# EAGLE board BMS_header (EAGLE 7.6.0)
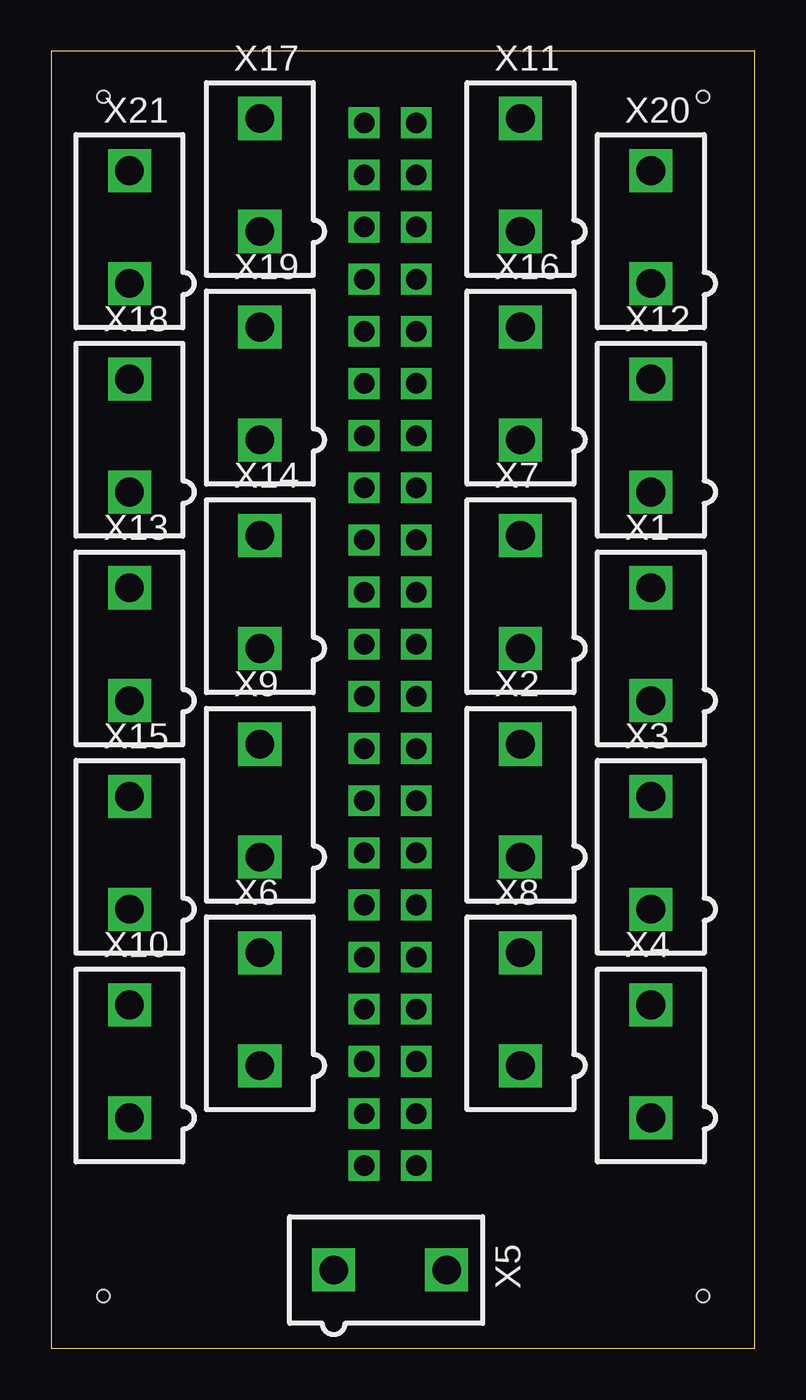
[diagram p0: board, top side]
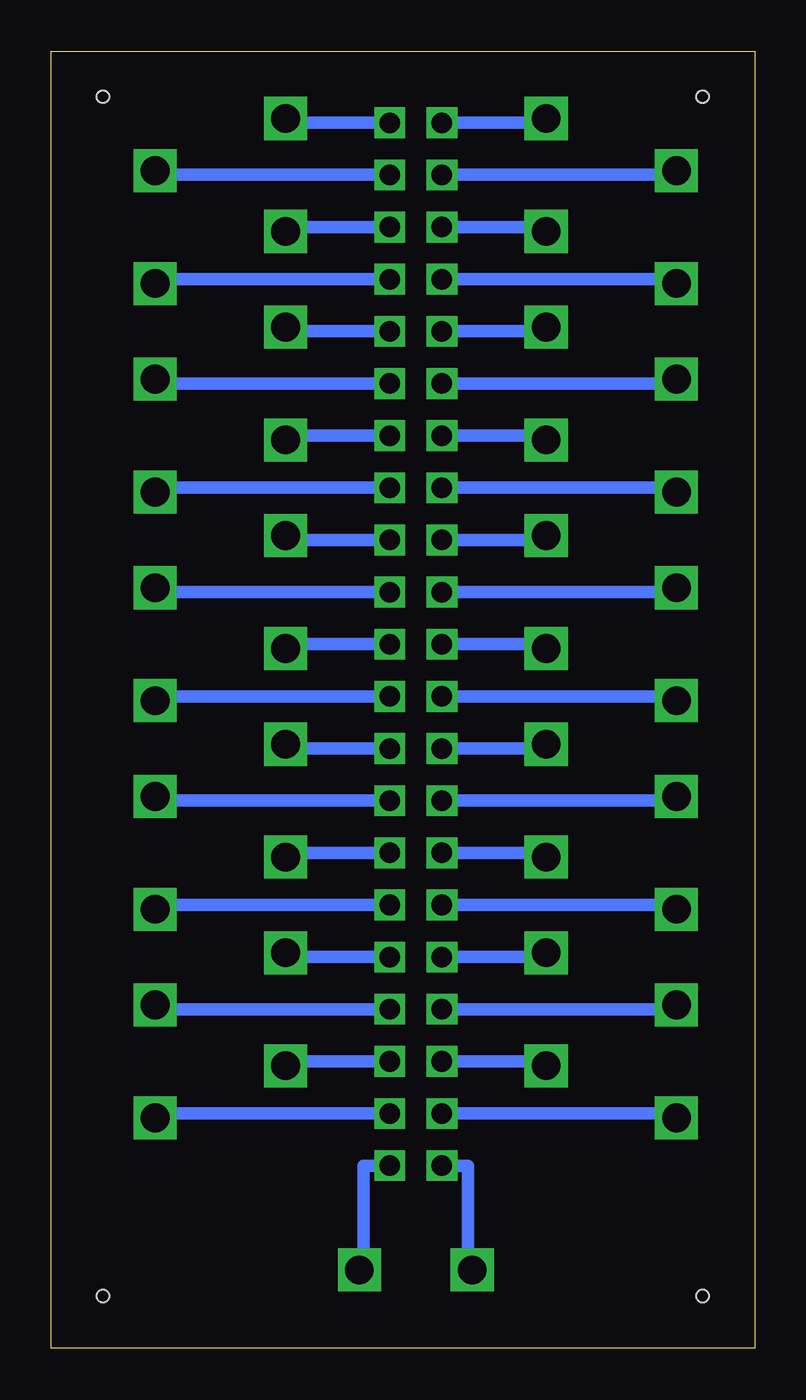
[diagram p1: board, bottom side, seen from below]

Size 34.27 x 63.17 mm. Coordinates in mm from the lower left corner, seen from the top.
Outline: 0,0 34.27,0 34.27,63.17 0,63.17 0,0
Copper layers (1*16): Top 0.035mm / dielectric 1.5mm / Bottom 0.035mm
Design rules "default": minimum track width 10mil, minimum drill 24mil, track to track 8mil, track to pad 8mil, pad to pad 8mil, via to via 8mil, smd to smd 8mil, copper to edge 40mil, drill to drill 8mil, minimum pad ring 10mil, minimum via ring 8mil, stop-mask expansion 4mil, vias tented up to drill 0mil, thermal gap 10mil
Holes 0.6 mm at 2.54,60.96 31.75,60.96 31.75,2.54 2.54,2.54

## Footprints (pad centres in the part's own frame; a part is rotated, then mirrored left to right if it is on the bottom)
MINIFIT_5566-2 = drill 1.4 square: 1 0,-2.75; 2 0,2.75

## Placement (x,y rotation side)
X1  MINIFIT_5566-2  [MINIFIT_5566-2]  29.21,34.29 0 top
X2  MINIFIT_5566-2  [MINIFIT_5566-2]  22.86,26.67 0 top
X3  MINIFIT_5566-2  [MINIFIT_5566-2]  29.21,24.13 0 top
X4  MINIFIT_5566-2  [MINIFIT_5566-2]  29.21,13.97 0 top
X5  MINIFIT_5566-2  [MINIFIT_5566-2]  16.51,3.81 270 top
X6  MINIFIT_5566-2  [MINIFIT_5566-2]  10.16,16.51 0 top
X7  MINIFIT_5566-2  [MINIFIT_5566-2]  22.86,36.83 0 top
X8  MINIFIT_5566-2  [MINIFIT_5566-2]  22.86,16.51 0 top
X9  MINIFIT_5566-2  [MINIFIT_5566-2]  10.16,26.67 0 top
X10  MINIFIT_5566-2  [MINIFIT_5566-2]  3.81,13.97 0 top
X11  MINIFIT_5566-2  [MINIFIT_5566-2]  22.86,57.15 0 top
X12  MINIFIT_5566-2  [MINIFIT_5566-2]  29.21,44.45 0 top
X13  MINIFIT_5566-2  [MINIFIT_5566-2]  3.81,34.29 0 top
X14  MINIFIT_5566-2  [MINIFIT_5566-2]  10.16,36.83 0 top
X15  MINIFIT_5566-2  [MINIFIT_5566-2]  3.81,24.13 0 top
X16  MINIFIT_5566-2  [MINIFIT_5566-2]  22.86,46.99 0 top
X17  MINIFIT_5566-2  [MINIFIT_5566-2]  10.16,57.15 0 top
X18  MINIFIT_5566-2  [MINIFIT_5566-2]  3.81,44.45 0 top
X19  MINIFIT_5566-2  [MINIFIT_5566-2]  10.16,46.99 0 top
X20  MINIFIT_5566-2  [MINIFIT_5566-2]  29.21,54.61 0 top
X21  MINIFIT_5566-2  [MINIFIT_5566-2]  3.81,54.61 0 top

## Library data of the parts
X1-X21 = HyTechDevices; OC_FARNELL: 1822072; OC_NEWARK: unknown

## Tracks (layer width: path | path; a pad name or v marks a point on that pad's centre or on a via)
N$1  (via drill 1)
  Bottom 0.61: 10.16,59.69 v15.24,59.69
N$2  (via drill 1)
  Bottom 0.61: v15.24,57.15 3.81,57.15
N$3  (via drill 1)
  Bottom 0.61: v17.78,59.69 22.86,59.69
N$4  (via drill 1)
  Bottom 0.61: v17.78,57.15 29.21,57.15
N$5  (via drill 1)
  Bottom 0.61: v15.24,54.61 10.16,54.61
N$6  (via drill 1)
  Bottom 0.61: v17.78,54.61 22.86,54.61
N$7  (via drill 1)
  Bottom 0.61: v15.24,52.07 3.81,52.07
N$8  (via drill 1)
  Bottom 0.61: v17.78,52.07 29.21,52.07
N$9  (via drill 1)
  Bottom 0.61: v15.24,46.99 3.81,46.99
N$10  (via drill 1)
  Bottom 0.61: v17.78,49.53 22.86,49.53
N$11  (via drill 1)
  Bottom 0.61: v15.24,44.45 10.16,44.45
N$12  (via drill 1)
  Bottom 0.61: v17.78,46.99 29.21,46.99
N$13  (via drill 1)
  Bottom 0.61: v15.24,41.91 3.81,41.91
N$14  (via drill 1)
  Bottom 0.61: v17.78,44.45 22.86,44.45
N$15  (via drill 1)
  Bottom 0.61: v17.78,41.91 29.21,41.91
N$16  (via drill 1)
  Bottom 0.61: v15.24,36.83 3.81,36.83
N$17  (via drill 1)
  Bottom 0.61: v15.24,39.37 10.16,39.37
N$18  (via drill 1)
  Bottom 0.61: v17.78,39.37 22.86,39.37
N$19  (via drill 1)
  Bottom 0.61: v17.78,36.83 29.21,36.83
N$20  (via drill 1)
  Bottom 0.61: v15.24,29.21 10.16,29.21
N$21  (via drill 1)
  Bottom 0.61: v15.24,34.29 10.16,34.29
N$22  (via drill 1)
  Bottom 0.61: v17.78,34.29 22.86,34.29
N$23  (via drill 1)
  Bottom 0.61: v17.78,31.75 29.21,31.75
N$24  (via drill 1)
  Bottom 0.61: v15.24,31.75 3.81,31.75
N$25  (via drill 1)
  Bottom 0.61: v17.78,29.21 22.86,29.21
N$26  (via drill 1)
  Bottom 0.61: v15.24,26.67 3.81,26.67
N$27  (via drill 1)
  Bottom 0.61: v17.78,26.67 29.21,26.67
N$28  (via drill 1)
  Bottom 0.61: v15.24,19.05 10.16,19.05
N$29  (via drill 1)
  Bottom 0.61: v17.78,24.13 22.86,24.13
N$30  (via drill 1)
  Bottom 0.61: v15.24,24.13 10.16,24.13
N$31  (via drill 1)
  Bottom 0.61: v15.24,21.59 3.81,21.59
N$32  (via drill 1)
  Bottom 0.61: v17.78,21.59 29.21,21.59
N$33  (via drill 1)
  Bottom 0.61: v17.78,19.05 22.86,19.05
N$34  (via drill 1)
  Bottom 0.61: v15.24,13.97 10.16,13.97
N$35  (via drill 1)
  Bottom 0.61: v15.24,16.51 3.81,16.51
N$36  (via drill 1)
  Bottom 0.61: v17.78,16.51 29.21,16.51
N$37  (via drill 1)
  Bottom 0.61: v17.78,13.97 22.86,13.97
N$38  (via drill 1)
  Bottom 0.61: v17.78,8.89 19.05,8.89 19.05,3.81
N$39  (via drill 1)
  Bottom 0.61: v15.24,11.43 3.81,11.43
N$40  (via drill 1)
  Bottom 0.61: v17.78,11.43 29.21,11.43
N$41  (via drill 1)
  Bottom 0.61: v15.24,8.89 13.97,8.89 13.97,3.81
N$43  (via drill 1)
  Bottom 0.61: v15.24,49.53 10.16,49.53